# Altium PCB PCB2.PcbDoc
Units mm, origin at the board's own origin, x right, y up, seen from the top; angles counter-clockwise.
Board outline 51.26 x 60.5 mm, 4 copper layers (Component Side, Ground Plane, Power Plane, Solder Side), stack 1.526 mm thick; 65 components, 55 nets, 254 pads, 144 vias.
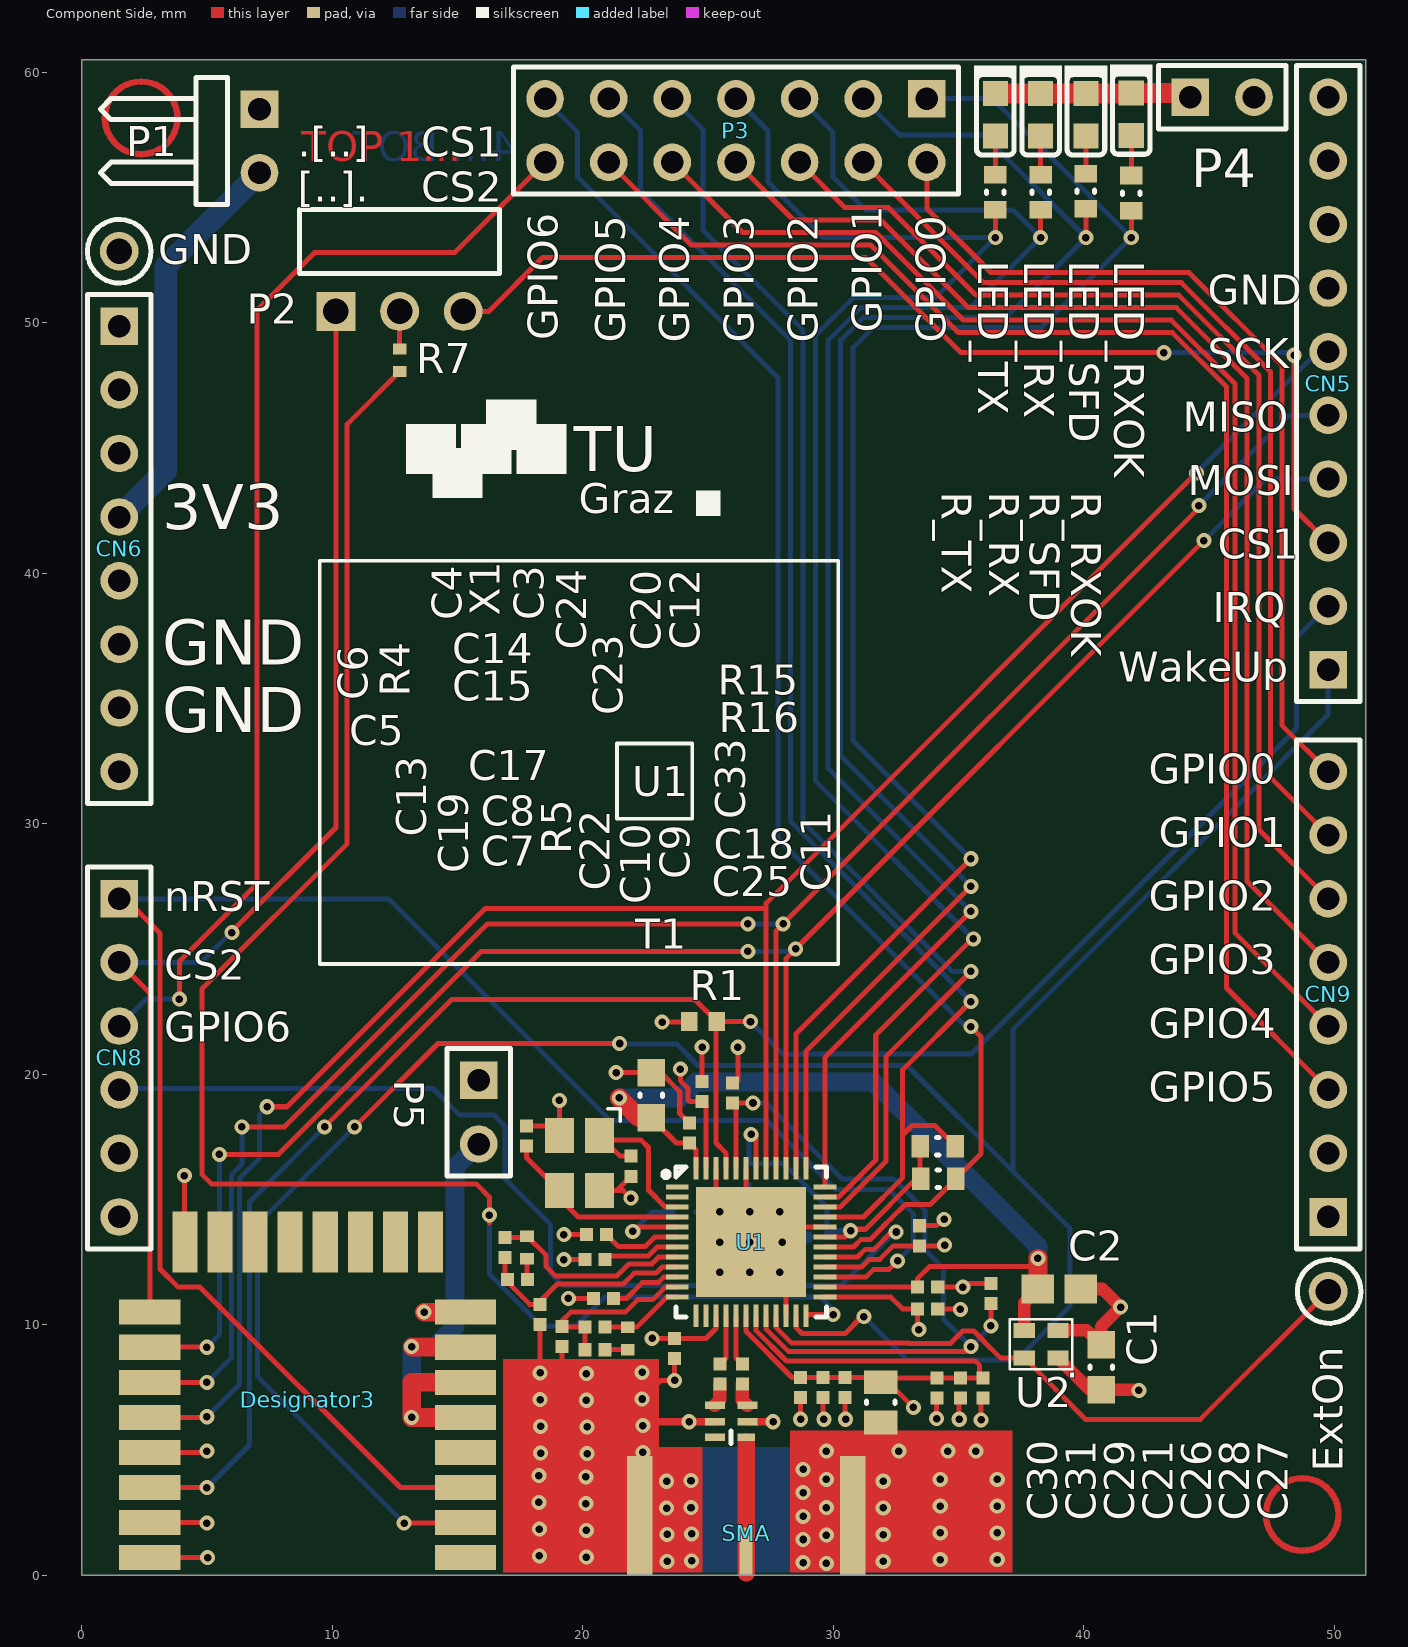
[diagram p0: Component Side view]
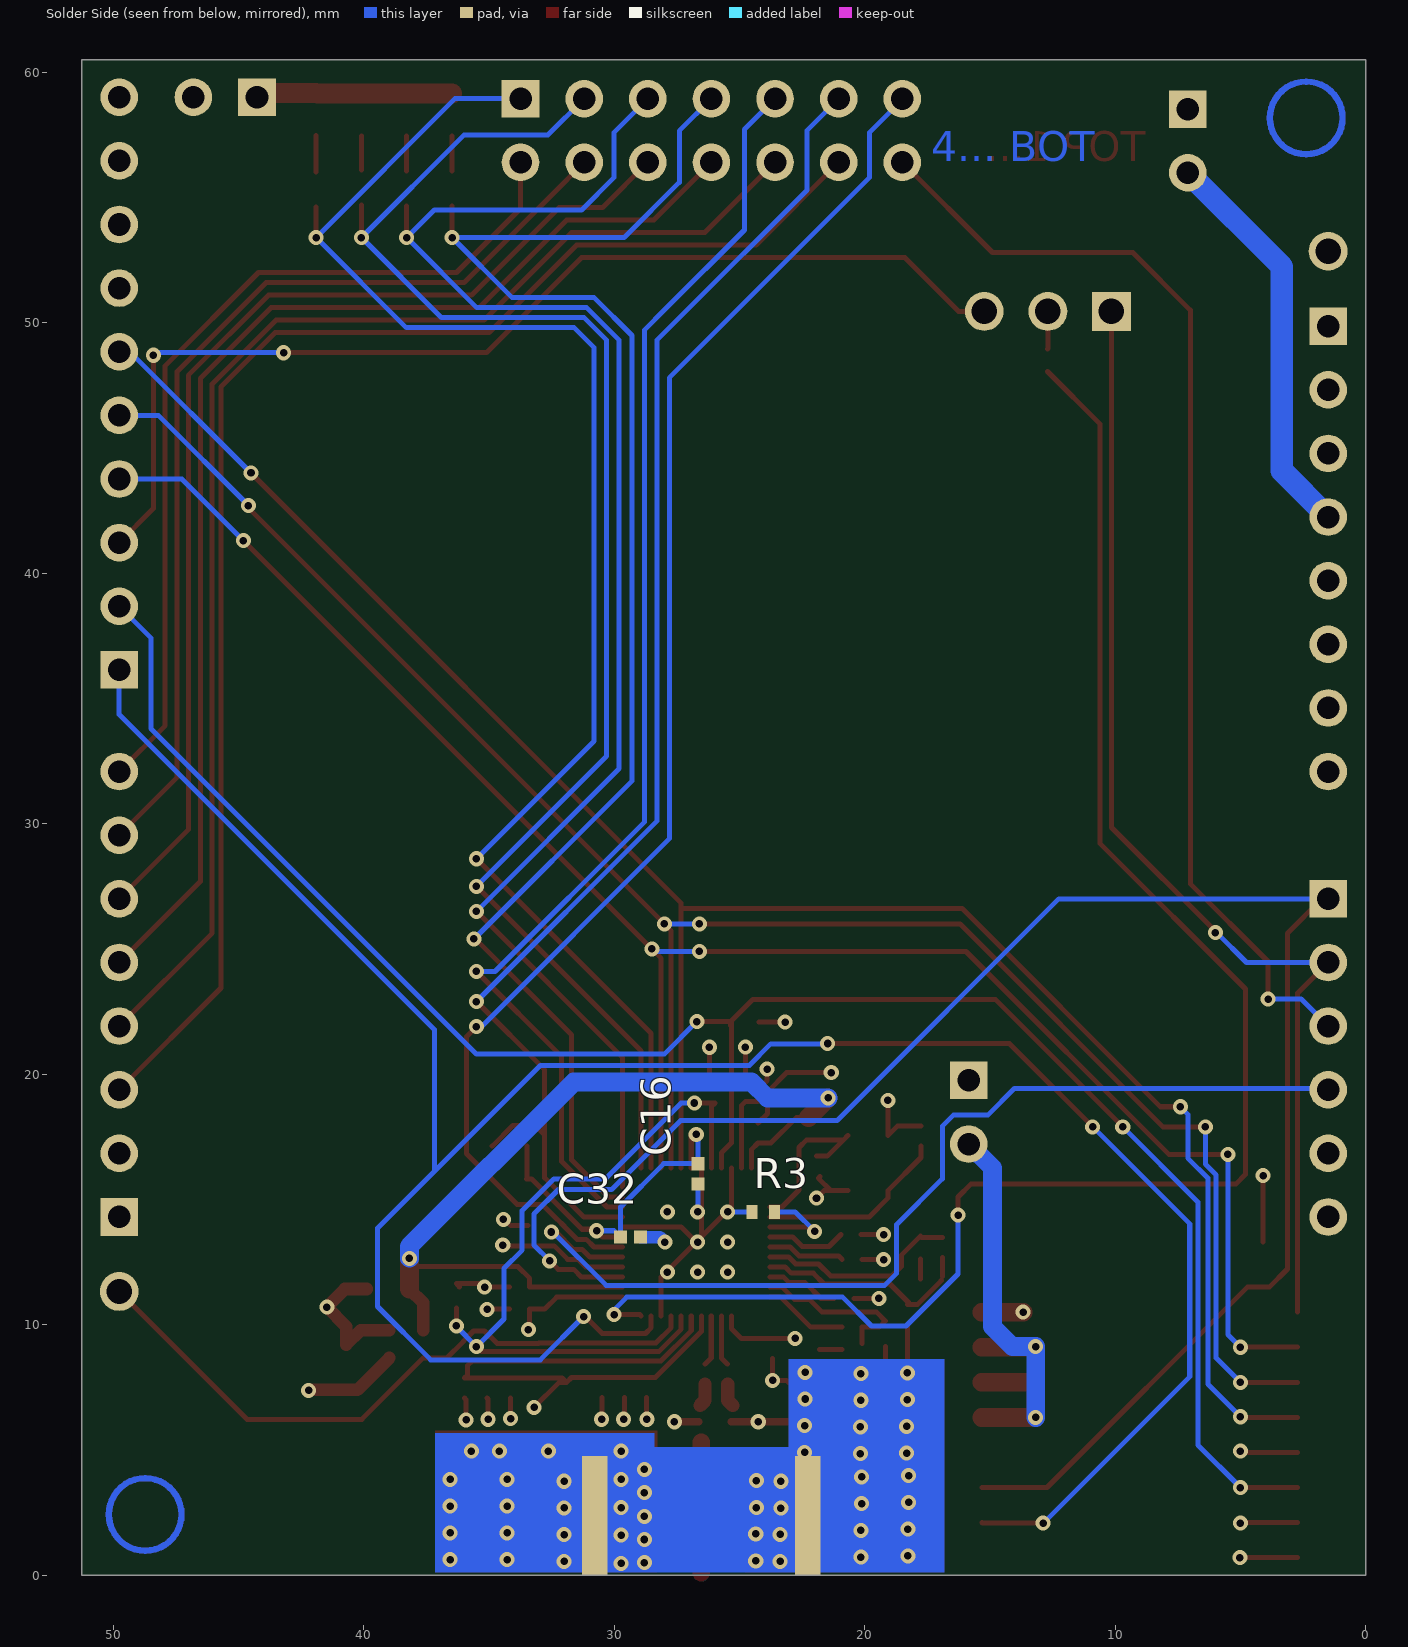
[diagram p1: Solder Side view, seen from below]
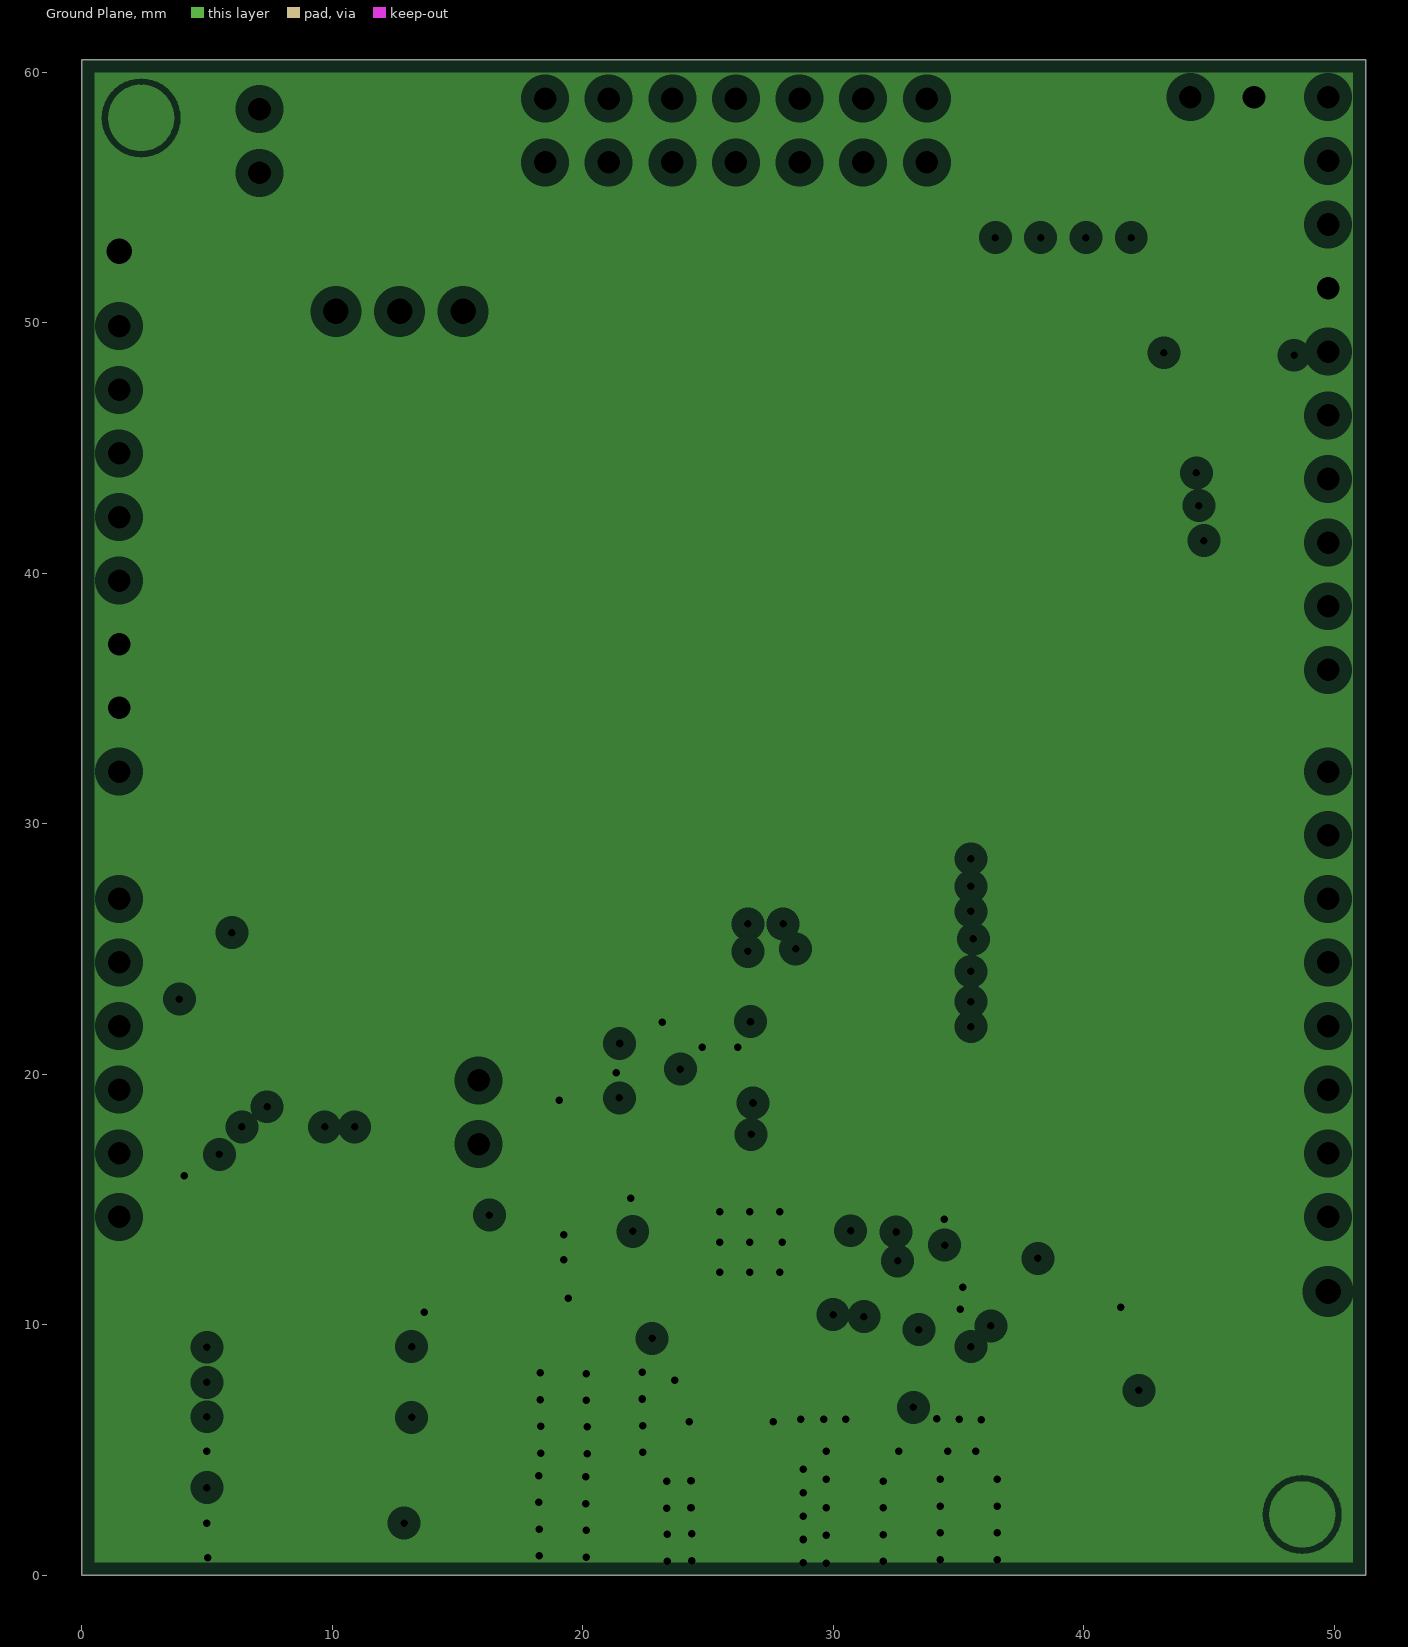
[diagram p2: Ground Plane, clearances drawn from the general rule]
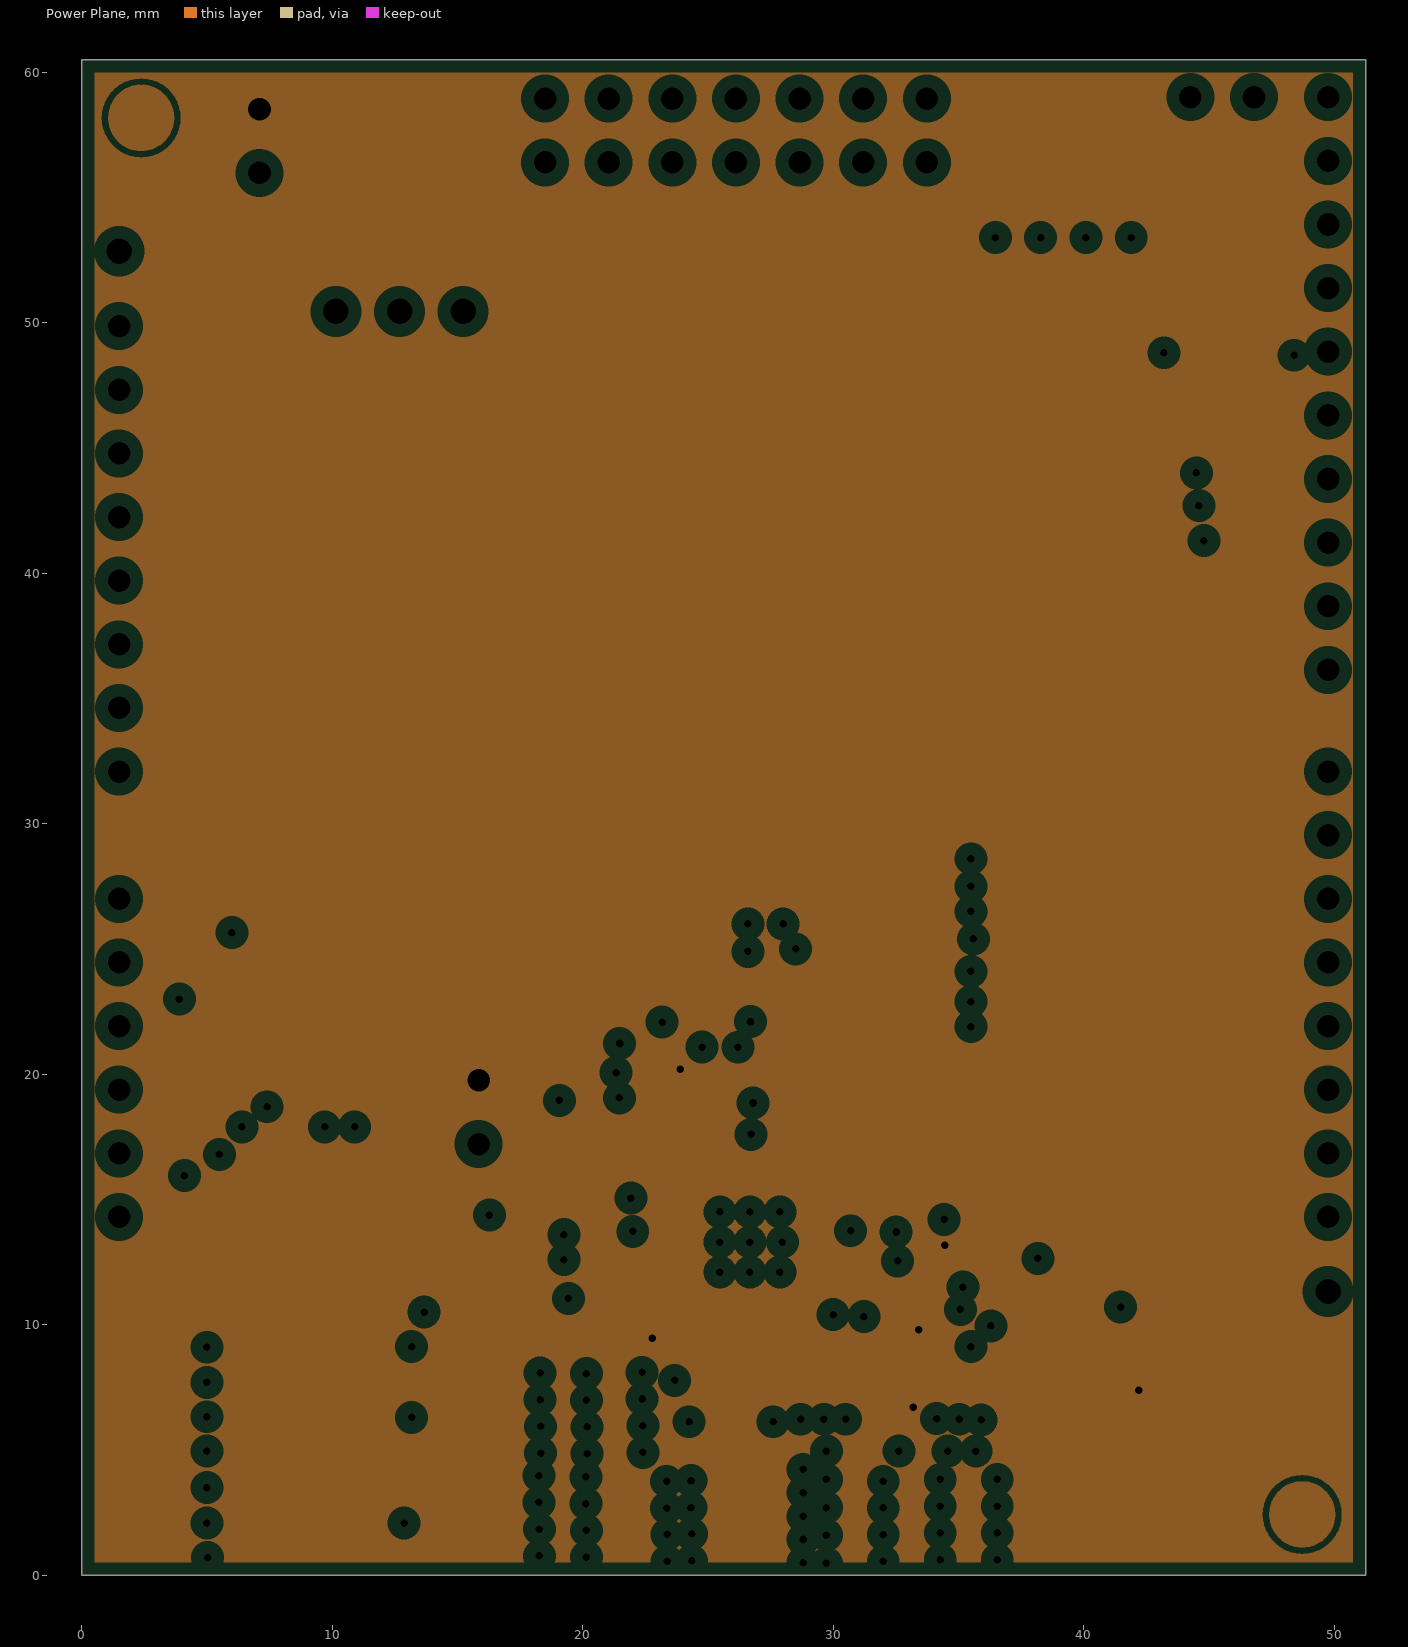
[diagram p3: Power Plane, clearances drawn from the general rule]

## Layer stack, top to bottom
Top Solder: solder mask 0.0102, Solder Resist, Dk 3.5
Component Side: signal copper 0.035
Dielectric 1: prepreg 0.36, FR-4, Dk 4.32
Ground Plane: plane copper 0.018, net GND
Dielectric 3: core 0.7, Dk 4.32
Power Plane: plane copper 0.018, net +3V3
Dielectric 4: prepreg 0.36, Dk 4.32
Solder Side: signal copper 0.035
Bottom Solder: solder mask 0.0102, Solder Resist, Dk 3.5

## Board outline
0,0 51.26,0 51.26,60.5 0,60.5

## Design rules (kind name [scope] priority, off if disabled: settings)
AssemblyTestPointUsage [All] p1: valid=1
Clearance [All] p1: gap=0.1 ignorepadtopadclearanceinfootprint=TRUE except(0.125: Arc-Arc Arc-Track Arc-SMDPad Arc-THPad Arc-Via Track-Track Track-SMDPad Track-THPad Track-Via SMDPad-Via Via-Via; 0.15: SMDPad-SMDPad)
ComponentClearance [All] p1: gap=0.254 collisioncheckmode=3 verticalgap=0.254 showdistances=TRUE
DiffPairsRouting [InDifferentialPair('rf_out')] p1: maxlimit=0.254 minlimit=0.2 mostfreqgap=0.2 toplayer_minwidth=0.2 toplayer_maxwidth=0.381 toplayer_prefwidth=0.2 bottomlayer_minwidth=0.2 bottomlayer_maxwidth=0.381 bottomlayer_prefwidth=0.2 maxuncoupledlength=12.7
FabricationTestPointUsage [All] p1: valid=1 allowmultiple=FALSE
HoleSize [All] p1: absolutevalues=TRUE maxlimit=6 minlimit=0.2 maxpercent=80.000 minpercent=20.000
HoleToHoleClearance [All] p1: gap=0.3 allowstackedmicrovias=FALSE
MaxMinImpedance "Schematic Impedance Constraint_2" [InNet('NetC9_2')] p1: minimum=50,00 maximum=50,00
MaxMinImpedance "Schematic Impedance Constraint_1" [InNet('NetC10_2')] p2: minimum=50,00 maximum=50,00
MaxMinImpedance "Schematic Impedance Constraint" [InNet('NetSMA_S')] p3: minimum=50,00 maximum=50,00
MinimumAnnularRing [All] p1: minimumring=0.1
MinimumSolderMaskSliver [All] p1: minsoldermaskwidth=0.1
PasteMaskExpansion [All] p1: expansion=0.05
PlaneClearance [All] p1: clearance=0.508
PlaneConnect [All] p1: planeconnectstyle=Direct reliefexpansion=0.508 reliefentries=4 reliefconductorwidth=0.254 reliefairgap=0.254
PolygonConnect [All] p1: connectstyle=Direct reliefconductorwidth=0.254 reliefentries=4 polygonreliefangle="90 Angle" airgapwidth=0.254
RoutingCorners [All] p1: cornerstyle=45-Degree minsetback=0.2 maxsetback=0.2
RoutingVias [InDrillLayerPair('Component Side - Solder Side')] p1: holewidth=0.3 width=0.6 viastyle="Through Hole" minholewidth=0.2 minwidth=0.4 maxholewidth=1.02 maxwidth=2.54
SilkToSilkClearance [All] p1: silktosilkclearance=0.1
SilkToSolderMaskClearance [IsPad] p1: minsilkscreentomaskgap=0.15 clearancetoexposedcopper=TRUE
SolderMaskExpansion [All] p1: expansion=0.102
Width Width_2 [InNetClass('50ohmclass')] p1: maxlimit=0.535 minlimit=0.535 preferedwidth=0.535 impedancedriven=TRUE minimp=50.000000 maximp=50.000000 favimp=50.000000
Width [All] p2: maxlimit=1 minlimit=0.2 preferedwidth=0.2 minimp=100.000000 maximp=100.000000 favimp=100.000000
17 further rules are at their usual default settings.

## Components (designator, comment, footprint, x,y, rotation, side; value= is the part's Value field where it differs from the comment)
C1 "4.7uF" CAPC0603(1608)100_M 40.7,8.3 r270 top
C2 "10µF" CAPC1608X100X35ML20T25 39.025,11.425 r0 top
C3 "9pF" CAPC0402(1005)60_L 21.925,16.325 r270 top
C4 "9pF" CAPC0402(1005)60_L 17.75,17.525 r90 top
C5 "27pF" CAPC0402(1005)60_L 17.399,11.811 r180 top
C6 "1.2pF" CAPC0402(1005)60_L 16.891,13.081 r270 top
C7 "820pF" CAPC0402(1005)60_L 20.5,9 r0 top
C8 "18pF" CAPC0402(1005)60_L 20.5,9.9 r180 top
C9 "12pF" CAPC0402(1005)60_L 26.375,8.025 r270 top
C10 "12pF" CAPC0402(1005)60_L 25.475,8.025 r270 top
C11 "100nF" CAPC0402(1005)60_L 36.3,11.25 r90 top
C12 "100nF" CAPC0402(1005)60_L 25.975,19.25 r90 top
C13 "100nF" CAPC0402(1005)60_L 18.288,10.414 r270 top
C14 "100nF" CAPC0402(1005)60_L 20.55,13.6 r180 top
C15 "100nF" CAPC0402(1005)60_L 20.5,12.6 r180 top
C16 "100nF" CAPC0402(1005)60_L 26.65,16.025 r270 bottom
C17 "100nF" CAPC0402(1005)60_L 20.828,11.049 r180 top
C18 "100nF" CAPC0402(1005)60_L 33.775,11.5 r0 top
C19 "100nF" CAPC0402(1005)60_L 19.177,9.525 r270 top
C20 "100nF" CAPC0402(1005)60_L 24.765,19.304 r90 top
C21 "47uF" CAPC0805(2012)145_L 31.9,6.9 r90 top
C22 "10nF" CAPC0402(1005)60_L 23.675,9.05 r270 top
C23 "100nF" CAPC0402(1005)60_L 24.257,17.653 r90 top
C24 "4.7uF" CAPC0603(1608)100_M 22.733,19.166 r270 top
C25 "100nF" CAPC0402(1005)60_L 33.775,10.625 r0 top
C26 "100nF" CAPC0402(1005)60_L 34.15,7.475 r270 top
C27 "10pF" CAPC0402(1005)60_L 35.975,7.475 r90 top
C28 "330pF" CAPC0402(1005)60_L 35.075,7.475 r270 top
C29 "100nF" CAPC0402(1005)60_L 30.48,7.493 r270 top
C30 "10pF" CAPC0402(1005)60_L 28.702,7.493 r90 top
C31 "330pF" CAPC0402(1005)60_L 29.591,7.493 r270 top
C32 "100nF" CAPC0402(1005)60_L 29.35,13.5 r180 bottom
C33 "100nF" CAPC0402(1005)60_L 33.45,13.55 r90 top
CN5 "digital" HDR1X10 49.76,36.14 r90 top locked
CN6 "POWER" HDR1X8 1.5,49.86 r270 top locked
CN8 "analog" HDR1X6 1.5,27 r270 top locked
CN9 "digital" HDR1X8 49.76,14.3 r90 top locked
Designator3 "Comment" DWM1000 12.525,13.3 r180 top
ExtOn "Component_1" KSTN-5000#1 49.8,11.325 r0 top
GND "Component_1" KSTN-5000#2 1.5,52.85 r0 top
LED_RX "APG1608CGKC/T" KING-LED0603-25-GREEN_V 38.283,58.3 r270 top
LED_RXOK "APG1608CGKC/T" KING-LED0603-25-GREEN_V 41.9,58.325 r270 top
LED_SFD "APG1608CGKC/T" KING-LED0603-25-GREEN_V 40.092,58.3 r270 top
LED_TX "APG1608CGKC/T" KING-LED0603-25-GREEN_V 36.475,58.3 r270 top
P1 "CurrentProbe" HDR1X2H 7.1,58.525 r270 top
P2 "Through-hole" SMTC-MTSW-103-08-X-S-229-RA 10.15,50.45 r0 top
P3 "GPIOx Enable" HDR2X7 33.74,58.94 r180 top
P4 "LEDs enable" HDR1X2 44.26,59 r0 top
P5 "DWM enable" HDR1X2 15.85,19.75 r270 top
R1 "100K 1%" RESC0402(1005)_M 24.8,22.1 r180 top value="100000.00 Ohm"
R3 "11K 1%" RESC0402(1005)_L 24.05,14.5 r0 bottom value="11000.00 Ohm"
R4 "16000.00 Ohm" RESC0402(1005)_L 17.78,13.081 r270 top
R5 "270.00 Ohm" RESC0402(1005)_L 21.8,9.45 r90 top
R7 "100.00 Ohm" RESC0402(1005)_L 12.7,48.5 r90 top
R15 "10K" RESC0603(1608)_L 34.175,17.125 r180 top value="10000.00 Ohm"
R16 "10K" RESC0603(1608)_L 34.2,15.825 r180 top value="10000.00 Ohm"
R_RX "470R" RESC0603(1608)_L 38.283,55.2 r90 top value="470.00 Ohm"
R_RXOK "470R" RESC0603(1608)_L 41.9,55.175 r90 top value="470.00 Ohm"
R_SFD "470R" RESC0603(1608)_L 40.092,55.25 r90 top value="470.00 Ohm"
R_TX "470R" RESC0603(1608)_L 36.475,55.2 r90 top value="470.00 Ohm"
SMA "0732511150" sma_footprint 26.525,0 r0 top
T1 "HHM1595A1" HHM1595A1 26.55,5.125 r90 top
U1 "DW1000 IC" QFN-48 26.725,13.3 r0 top
U2 "81-LXDC2HL18A-052" PCBComponent_1 39.55,10.225 r180 top
X1 "38.4MHz" tsx_3225fp 19.075,17.55 r270 top

## Footprints (in the part's own frame and the unit in brackets; to place one, negate y for a bottom-side part, rotate by r counter-clockwise, add the part's x,y. Pads: shape width x height; smd on the part's side, far side on the other; paste and mask are expansions set on the pad)
CAPC0402(1005)60_L [mm] "Chip Capacitor, Body 1.0x0.5mm, Height 0.6mm, IPC High Density"
  rect 0.52x0.52 smd: 1(-0.4,0) 2(0.4,0)
  body extent -0.55,-0.3 0.55,0.3, height 0.6
CAPC0603(1608)100_M [mm] "Chip Capacitor, Body 1.6x0.8mm, Height 1.0mm, IPC Low Density"
  rect 1.1x1.1 smd: 1(-0.9,0) 2(0.9,0)
  silkscreen extent -0.05,-0.45 0.05,0.45, body extent -0.87,-0.47 0.88,0.48, height 1
CAPC0805(2012)145_L [mm] "Chip Capacitor, Body 2.0x1.2mm, Height 1.45mm, IPC High Density"
  rect 0.95x1.35 smd: 1(-0.8,0) 2(0.8,0)
  silkscreen extent -0.05,-0.58 0.05,0.58, body extent -1.1,-0.72 1.1,0.72, height 1.45
CAPC1608X100X35ML20T25 [mm] "Chip Capacitor, 2-Leads, Body 1.80x1.00mm, IPC Low Density"
  rect 1.3x1.15 smd: 1(-0.85,0) 2(0.85,0)
  body extent -0.9,-0.5 0.9,0.5, height 1
DWM1000 [mm]
  rect 2.45x1 smd: EXTON(-2.8,12.6) GPIO7(-2.8,8.4) IRQ/GPIO8(9.8,9.8) RST(-2.8,9.8) SPICLK(9.8,7) SPICSN(9.8,2.8) SPIMISO(9.8,5.6) SPIMOSI(9.8,4.2) VDD3V3(-2.8,4.2) VDD3V3.2(-2.8,5.6) VDDAON(-2.8,7) VSS(-2.8,2.8) VSS.2(9.8,12.6) VSS.3(9.8,11.2) VSS.4(9.8,8.4) WAKEUP(-2.8,11.2)
  rect 1x2.45 smd: GPIO0(7,0) GPIO1(5.6,0) GPIO2(4.2,0) GPIO3(2.8,0) GPIO4(1.4,0) GPIO5(0,0) GPIO6(-1.4,0) VSS.5(8.4,0)
HDR1X2 [mm] "Connector; Header; 2 Position"
  rect 1.5x1.5 hole 0.9: 1(0,0)
  round 1.5 hole 0.9: 2(2.54,0)
  silkscreen extent -1.27,-1.27 3.81,1.27
HDR1X2H [mm] "Connector; Header; 2 Position; Right Angle"
  rect 1.5x1.5 hole 0.9: 1(0,0)
  round 1.5 hole 0.9: 2(2.54,0)
  silkscreen extent -1.27,-6.35 3.81,-1.27
HDR1X6 [mm] "Connector; Header; 6 Position"
  rect 1.5x1.5 hole 0.9: 1(0,0)
  round 1.5 hole 0.9: 2(2.54,0) 3(5.08,0) 4(7.62,0) 5(10.16,0) 6(12.7,0)
  silkscreen extent -1.27,-1.27 13.97,1.27
HDR1X8 [mm] "Connector; Header; 8 Position"
  rect 1.5x1.5 hole 0.9: 1(0,0)
  round 1.5 hole 0.9: 2(2.54,0) 3(5.08,0) 4(7.62,0) 5(10.16,0) 6(12.7,0) 7(15.24,0) 8(17.78,0)
  silkscreen extent -1.27,-1.27 19.05,1.27
HDR1X10 [mm] "Connector; Header; 10 Position"
  rect 1.5x1.5 hole 0.9: 1(0,0)
  round 1.5 hole 0.9: 2(2.54,0) 3(5.08,0) 4(7.62,0) 5(10.16,0) 6(12.7,0) 7(15.24,0) 8(17.78,0) 9(20.32,0) 10(22.86,0)
  silkscreen extent -1.27,-1.27 24.13,1.27
HDR2X7 [mm] "Connector; Header; 7x2 Position"
  rect 1.5x1.5 hole 0.9: 1(0,0)
  round 1.5 hole 0.9: 2(0,2.54) 3(2.54,0) 4(2.54,2.54) 5(5.08,0) 6(5.08,2.54) 7(7.62,0) 8(7.62,2.54) 9(10.16,0) 10(10.16,2.54) 11(12.7,0) 12(12.7,2.54) 13(15.24,0) 14(15.24,2.54)
  silkscreen extent -1.27,-1.27 16.51,3.81
HHM1595A1 [mm]
  rect 0.3x0.7 smd: 1(0.375,0.025)
  rect 0.3x0.8 smd: 2(1,-0.025) 3(1.65,-0.025) 4(1.65,1.275) 5(1,1.275) 6(0.375,1.275)
  silkscreen extent 0.13,0.63 0.63,0.63, body extent 0,0 2,1.25, height 0.8
KING-LED0603-25-GREEN_V [mm] "LED, SMT, Body 1.6 x 0.8 mm, 0.25mm Thickness"
  rect 1x1 smd paste+0 mask+0: 1(0.85,0) 2(-0.85,0)
  silkscreen extent -1.97,-0.85 1.6,0.85, body extent -0.8,-0.4 0.8,0.4, height 0.25
KSTN-5000#1 [mm] "Test Point, Through Hole, Dia 2.54 mm"
  round 1.55 hole 1.016: 1(-0.04,0)
  silkscreen extent -1.27,-1.27 1.27,1.27, body extent -1.25,-1.25 1.25,1.25, height 4.62
KSTN-5000#2 [mm] "Test Point, Through Hole, Dia 2.54 mm"
  round 1.55 hole 1.016: 1(0,0)
  silkscreen extent -1.27,-1.27 1.27,1.27, body extent -1.25,-1.25 1.25,1.25, height 4.62
PCBComponent_1 [mm]
  rect 0.85x0.6 smd: 1(0.575,1.55) 2(1.925,1.55) 3(1.925,0.45) 4(0.575,0.45)
  silkscreen extent 0,0 2.5,2
QFN-48 [mm] "48 Pin QFN"
  rect 0.9x0.2 smd mask+0.05: 1(-2.95,2.2) 2(-2.95,1.8) 3(-2.95,1.4) 4(-2.95,1) 5(-2.95,0.6) 6(-2.95,0.2) 7(-2.95,-0.2) 8(-2.95,-0.6) 9(-2.95,-1) 10(-2.95,-1.4) 11(-2.95,-1.8) 12(-2.95,-2.2) 25(2.95,-2.2) 26(2.95,-1.8) 27(2.95,-1.4) 28(2.95,-1) 29(2.95,-0.6) 30(2.95,-0.2) 31(2.95,0.2) 32(2.95,0.6) 33(2.95,1) 34(2.95,1.4) 35(2.95,1.8) 36(2.95,2.2)
  rect 0.2x0.9 smd mask+0.05: 13(-2.2,-2.95) 14(-1.8,-2.95) 15(-1.4,-2.95) 16(-1,-2.95) 17(-0.6,-2.95) 18(-0.2,-2.95) 19(0.2,-2.95) 20(0.6,-2.95) 21(1,-2.95) 22(1.4,-2.95) 23(1.8,-2.95) 24(2.2,-2.95) 37(2.2,2.95) 38(1.8,2.95) 39(1.4,2.95) 40(1,2.95) 41(0.6,2.95) 42(0.2,2.95) 43(-0.2,2.95) 44(-0.6,2.95) 45(-1,2.95) 46(-1.4,2.95) 47(-1.8,2.95) 48(-2.2,2.95)
  rect 4.4x4.4 smd paste-4.4 mask+0.05: 49(0,0)
  rect 1.3x1.3 on Top Paste mask+0.05: Paste1(0,0) Paste2(-1.45,1.45) Paste3(-1.45,-1.45) Paste4(1.45,-1.45) Paste5(1.45,1.45) Paste6(1.45,0) Paste7(-1.45,0) Paste8(0,1.45) Paste9(0,-1.45)
  silkscreen extent -3.5,-3 3,3, body extent -3,-3 3,3, height 1
RESC0402(1005)_L [mm] "Chip Resistor, Body 1.0x0.5mm, IPC High Density"
  rect 0.45x0.55 smd: 1(-0.45,0) 2(0.45,0)
  body extent -0.52,-0.27 0.53,0.28, height 0.4
RESC0402(1005)_M [mm] "Chip Resistor, Body 1.0x0.5mm, IPC Low Density"
  rect 0.65x0.75 smd: 1(-0.55,0) 2(0.55,0)
  body extent -0.52,-0.28 0.53,0.28, height 0.4
RESC0603(1608)_L [mm] "Chip Resistor, Body 1.6x0.8mm, IPC High Density"
  rect 0.7x0.9 smd: 1(-0.7,0) 2(0.7,0)
  silkscreen extent -0.05,-0.35 0.05,0.35, body extent -0.85,-0.47 0.85,0.47, height 0.6
sma_footprint [mm]
  rect 1.02x4.75 smd: G(-4.25,2.375) G(4.25,2.375)
  rect 1.02x4.75 smd far side: G(-4.25,2.375) G(4.25,2.375)
  rect 0.51x1.91 smd: S(0,0.955)
SMTC-MTSW-103-08-X-S-229-RA [mm] "Assembly .025\" [.64] SQ Post Terminal Strip, 1x3 Pins, Right Angle, 2.54mm Pitch, Male"
  rect 1.55x1.55 hole 1.02: 1(0,0)
  round 1.55 hole 1.02: 2(2.54,0) 3(5.08,0)
  silkscreen extent -1.46,1.52 6.54,4.06, body extent -1.27,-0.32 6.35,9.88, height 3.05
tsx_3225fp [mm]
  rect 1.4x1.15 smd: 1(0,1.6) 2(2.2,1.6) 3(2.2,0) 4(0,0)
  silkscreen extent -1.07,1.92 -0.58,2.42

## Part data
C1 C24: library part CMP-1035-02780-1, "CAP 4.7uF 6.3V ±10% 0603 (1608 Metric) Thickness 1mm SMD", Case-EIA=0603, Case-Metric=1608, Rated Voltage="6.3 V", Tolerance=±10%, Max Thickness="1 mm", Technology=SMT
C2: library part CMP-2000-05443-1, "High Value Multilayer Ceramic Capacitor, 10 uF, +/- 20%, 10 V, -55 to 85 degC, 0603 (1608 Metric), RoHS, Tape and Reel", Manufacturer="Taiyo Yuden", Operating Temperature=-55degC~85degC, Package / Case=0603(1608Metric), Package Description="2-Pin Surface Mount Device, Body 1.70 x 0.90 mm", Package Reference=603, Ratings=-, Standard Package=1, Temperature Coefficient=X5R, Tolerance=±20%, Voltage - Rated=10V, Applications=GeneralPurpose, Capacitance=10µF, Catalog Drawings=xMKSeries_0603_0.8, Category=Capacitors, Datasheet URL=https://datasheet.ciiva.com/15921/288lmk107bbj106malt-15921300.pdf, Datasheet Version=Apr-14, Family=CeramicCapacitors, Featured Product=MultilayerChipCapacitors, Features=-, Height - Seated (Max)=-, Lead Spacing=-, Lead Style=-, Manufacturer URL=http://www.t-yuden.com/, Mounting Type=SurfaceMount,MLCC, Online Catalog=MSeries, Other Names=587-2562-6, Packaging=Digi-Reel, Series=M, Size / Dimension="0.063\"Lx0.031\"W(1.60mmx0.80mm)", Thickness (Max)="0.035\"(0.90mm)"
C3 C4: library part CMP-1034-00643-1, "CAP 9pF 50V ±0.05pF 0402 (1005 Metric) Thickness 0.6mm SMD", Case-EIA=0402, Case-Metric=1005, Rated Voltage="50 V", Tolerance=±0.05pF, Max Thickness="0.6 mm", Technology=SMT
C5: library part CMP-1034-00961-1, "CAP 27pF 50V ±2% 0402 (1005 Metric) Thickness 0.6mm SMD", Case-EIA=0402, Case-Metric=1005, Rated Voltage="50 V", Tolerance=±2%, Max Thickness="0.6 mm", Technology=SMT
C6: library part CMP-1034-00083-1, "CAP 1.2pF 50V ±0.05pF 0402 (1005 Metric) Thickness 0.6mm SMD", Case-EIA=0402, Case-Metric=1005, Rated Voltage="50 V", Tolerance=±0.05pF, Max Thickness="0.6 mm", Technology=SMT
C7: library part CMP-1034-01592-1, "CAP 820pF 50V ±2% 0402 (1005 Metric) Thickness 0.6mm SMD", Case-EIA=0402, Case-Metric=1005, Rated Voltage="50 V", Tolerance=±2%, Max Thickness="0.6 mm", Technology=SMT
C8: library part CMP-1034-00863-1, "CAP 18pF 50V ±2% 0402 (1005 Metric) Thickness 0.6mm SMD", Case-EIA=0402, Case-Metric=1005, Rated Voltage="50 V", Tolerance=±2%, Max Thickness="0.6 mm", Technology=SMT
C9 C10: library part CMP-1034-00768-1, "CAP 12pF 50V ±2% 0402 (1005 Metric) Thickness 0.6mm SMD", Case-EIA=0402, Case-Metric=1005, Rated Voltage="50 V", Tolerance=±2%, Max Thickness="0.6 mm", Technology=SMT
C11 C12 C13 C14 C15 C16 C17 C18 C19 C20 C23 C25 C26 C29 C32 C33: library part CMP-1034-02069-1, "CAP 100nF 16V ±10% 0402 (1005 Metric) Thickness 0.6mm SMD", Case-EIA=0402, Case-Metric=1005, Rated Voltage="16 V", Tolerance=±10%, Max Thickness="0.6 mm", Technology=SMT
C21: library part CMP-1036-04950-1, "CAP 47uF 6.3V ±20% 0805 (2012 Metric) Thickness 1.45mm SMD", Case-EIA=0805, Case-Metric=2012, Rated Voltage="6.3 V", Tolerance=±20%, Max Thickness="1.45 mm", Technology=SMT
C22: library part CMP-1034-01880-1, "CAP 10nF 25V ±10% 0402 (1005 Metric) Thickness 0.6mm SMD", Case-EIA=0402, Case-Metric=1005, Rated Voltage="25 V", Tolerance=±10%, Max Thickness="0.6 mm", Technology=SMT
C27 C30: library part CMP-1034-00722-1, "CAP 10pF 50V ±2% 0402 (1005 Metric) Thickness 0.6mm SMD", Case-EIA=0402, Case-Metric=1005, Rated Voltage="50 V", Tolerance=±2%, Max Thickness="0.6 mm", Technology=SMT
C28 C31: library part CMP-1034-01432-1, "CAP 330pF 50V ±2% 0402 (1005 Metric) Thickness 0.6mm SMD", Case-EIA=0402, Case-Metric=1005, Rated Voltage="50 V", Tolerance=±2%, Max Thickness="0.6 mm", Technology=SMT
CN5: library part "Header 10", "Header, 10-Pin", LatestRevisionDate=17-Jul-2002, LatestRevisionNote="Re-released for DXP Platform.", Publisher="Altium Limited"
CN6 CN9: library part "Header 8", "Header, 8-Pin", LatestRevisionDate=17-Jul-2002, LatestRevisionNote="Re-released for DXP Platform.", Publisher="Altium Limited"
CN8: library part "Header 6", "Header, 6-Pin", LatestRevisionDate=17-Jul-2002, LatestRevisionNote="Re-released for DXP Platform.", Publisher="Altium Limited"
ExtOn GND: "test point"
LED_RX LED_RXOK LED_SFD LED_TX: library part CMP-0239-00001-1, "LED, SMT, 0603(1608), 0.25mm Thickness, Green", Forward Current="30 mA", Power Dissipation="78 mW", Reverse Voltage="5 V", Storage Temperature="-40 to 85 degC", ComponentLink1Description="Manufacturer URL", ComponentLink1URL=http://www.kingbrightusa.com/, ComponentLink2Description=Datasheet, ComponentLink2URL=http://www.kingbrightusa.com/images/catalog/SPEC/APG1608CGKC-T.pdf, DatasheetVersion="Rev. 5B, 10/2012", Mounting Technology="Surface Mount", PackageDescription="2-Pin SMT LED, 1.6 x 0.8 mm Body, 0.25mm Thickness", PackageReference=LED0603-25-GREEN, PackageVersion="Rev. 5B, 10/2012", Packing=Reel, PartNumber=APG1608CGKC/T
P1: library part "Header 2H", "Header, 2-Pin, Right Angle", LatestRevisionDate=17-Jul-2002, LatestRevisionNote="Re-released for DXP Platform.", Publisher="Altium Limited"
P2: library part CMP-1024-00100-1, "Modified .025\" SQ Post Header, Through-hole, Right Angle, -55 to 125 degC, 2.54 mm Pitch, 3-Pin, Male, RoHS", Manufacturer=Samtec, PartNumber=MTSW-103-08-G-S-229-RA, Temperature Range="-55 to 125 degC", ComponentLink1Description="Manufacturer URL", ComponentLink1URL=http://www.samtec.com, ComponentLink2Description=Datasheet, ComponentLink2URL=http://www.samtec.com/documents/webfiles/pdf/MTSW.PDF, ComponentLink3Description="Package Specification", ComponentLink3URL=http://www.samtec.com/documents/webfiles/cpdf/MTSW-XXX-XX-X-X-XXXX-XX-XXX-MKT1.pdf, DatasheetVersion=F-214, Mounting Technology=Through-hole, Orientation="Right Angle", PackageDescription="Assembly .025\" [.64] SQ Post Terminal Strip", PackageReference=MTSW-103-08-X-S-229-RA, PackageVersion="BI, 2/1987", Pitch="2.54 mm", RoHS=True
P3: library part "Header 7X2", "Header, 7-Pin, Dual row", LatestRevisionDate=17-Jul-2002, LatestRevisionNote="Re-released for DXP Platform.", Publisher="Altium Limited"
P4 P5: library part "Header 2", "Header, 2-Pin", LatestRevisionDate=17-Jul-2002, LatestRevisionNote="Re-released for DXP Platform.", Publisher="Altium Limited"
R1: library part CMP-1011-00736-1, "100K 0.063W 1% 0402 (1005 Metric)  SMD", Case-EIA=0402, Case-Metric=1005, Power="0.063 W", Tolerance="1 %", Technology=SMT
R3: library part CMP-1011-00627-1, "11K 0.063W 1% 0402 (1005 Metric)  SMD", Case-EIA=0402, Case-Metric=1005, Power="0.063 W", Tolerance="1 %", Technology=SMT
R4: library part CMP-1011-00644-1, "16K 0.063W 1% 0402 (1005 Metric)  SMD", Case-EIA=0402, Case-Metric=1005, Power="0.063 W", Tolerance="1 %", Technology=SMT
R5: library part CMP-1011-00444-1, "270R 0.063W 1% 0402 (1005 Metric)  SMD", Case-EIA=0402, Case-Metric=1005, Power="0.063 W", Tolerance="1 %", Technology=SMT
R7: library part CMP-1011-00397-1, "100R 0.063W 1% 0402 (1005 Metric)  SMD", Case-EIA=0402, Case-Metric=1005, Power="0.063 W", Tolerance="1 %", Technology=SMT
R15 R16: library part CMP-1012-00098-1, "10K 0.1W 5% 0603 (1608 Metric)  SMD", Case-EIA=0603, Case-Metric=1608, Power="0.1 W", Tolerance="5 %", Technology=SMT
R_RX R_RXOK R_SFD R_TX: library part CMP-1012-00473-1, "470R 0.1W 1% 0603 (1608 Metric)  SMD", Case-EIA=0603, Case-Metric=1608, Power="0.1 W", Tolerance="1 %", Technology=SMT
SMA: "CONN SMA JACK 50 OHM EDGE MNT", Dielectric Material="Polytetrafluoroethylene (PTFE)", Frequency - Max=18GHz, Housing Colour=Gold, Manufacturer="Molex, LLC", Operating Temperature="-65C ~ 165C", Supplier Part Number 1=WM5534-ND, Voltage Rating=500V, Body Finish=Gold, Body Material=Brass, Cable Group=-, Center Contact Material="Beryllium Copper", Center Contact Plating=Gold, ComponentLink1Description=Datasheet, ComponentLink1URL=http://www.molex.com/pdm_docs/sd/732511150_sd.pdf, ComponentLink2Description="Digi-Key Listing", ComponentLink2URL=http://www.digikey.ca/product-detail/en/molex-llc/0732511150/WM5534-ND/1465156, Contact Termination=Solder, Fastening Type=Threaded, Features=-, Impedance="50 Ohm", Ingress Protection=-, Mounting Type="Board Edge, End Launch", PartId=21185, Part Number=0732511150, Price=4.81, Series=73251, Shield Termination=Solder, Style=SMA, Supplier 1=Digi-Key, Type="Receptacle, Female Socket"
T1: "HHM1595A1 3000MHz - 8000MHz 0805", Category=Filter, Category Letter=T, Part Number=HHM1595A1
U1: library part DW1000_QFN_48, "UWB DW1000", Manufacturer="Decawave Ltd.", Part Number=DW1000_QFN, Component Code=n/a, ComponentLink1Description="Datasheet Link", Component Type=Standard
U2 X1: library part Component_1
  U2: Supplier 1=Mouser, Supplier Part Number 1=81-LXDC2HL18A-052

## Via types
v1: diameter 0.6, hole 0.3, Component Side to Solder Side, 143 vias
v2: diameter 0.6, hole 0.3, Component Side to Solder Side, tented top, 1 vias

## Nets (pads, with @x,y where several pads share a name; then routed paths per layer and width w, separated by ;. In a path a pad name is that pad's centre, name@x,y a point inside that pad or via, vN(x,y) a via of type N, cw(c..) or ccw(c..) an arc to the next point about the centre after c; other vN are vias at no path point)
+1V8: C2.1 C18.1 C23.1 C24.2 U1.26 U1.48 U2.3 | length 37
  Component Side w0.2: C24.2@22.247,18.266 C24.2 23.746,17.253 C23.1 24.525,16.985 U1.48 ; U1.26 C18.1 33.375,11.85 33.85,12.325 38.175,12.325
  Component Side w0.5: U2.3 37.625,10.875 C2.1@38.175,11.4
  Component Side w0.75: v1(21.463,19.05) C24.2@22.247,18.266 ; C2.1 38.175,12.325 v1(38.175,12.65)
  Solder Side w0.2: v1@38.163,12.662 v1(38.175,12.65)
  Solder Side w0.75: v1(21.463,19.05) 23.881,19.05 24.516,19.685 31.615,19.685 38.175,13.125 v1(38.175,12.65)
+3V3: C1.2 C20.1 C21.2 C22.1 C25.1 C26.1 C27.2 C28.1 C29.1 C30.2 C31.1 C33.1 P1.1 P5.1 U1.15 U1.18 U1.19 U1.25 U1.28 U1.47 U2.1 | length 44.9
  Component Side w0.2: v1(22.775,9.45) C22.1 24.925,9.45 25.325,9.85 U1.15 ; v1(23.9,20.2) 23.9,19.74 24.201,19.439 24.201,18.979 24.276,18.904 C20.1 24.925,18.744 U1.47 ; U1.18 26.525,9.725 28.357,7.893 C30.2 C31.1 C29.1 31.707,7.893 C21.2 ; U1.19 26.925,9.763 28.138,8.55 35.675,8.55 35.85,8.375 35.85,8 C27.2 C28.1 C26.1 32.075,7.875 C21.2 ; U1.25 32.3,11.1 32.775,10.625 C25.1 33.375,9.85 v1(33.425,9.8) ; U1.28 31.141,12.3 31.451,12.61 31.86,12.61 32.4,13.15 C33.1 34.425,13.15 v1(34.45,13.175) ; v2(33.2,6.7) 32.2,7.7 C21.2
  Component Side w0.5: U2.1 40.25,7.4 C1.2 42.175,7.4 v1(42.2,7.375)
CS1: CN5.3 P2.3 | length 43.8
  Component Side w0.2: P2.3 16.25,50.45 18.4,52.6 31.3,52.6 35.1,48.8 v1(43.2,48.8) ; v1@48.4,48.6 48.4,42.58 CN5.3 ; v1(48.4,48.7) v1@48.6,48.7
  Solder Side w0.2: v1(43.2,48.8) v1@48.4,48.8 ; CN5.3@49.755,41.225 CN5.3
CS2: CN8.2 Designator3.SPICSN P2.1 | length 46
  Component Side w0.2: CN8.2 2.725,23.235 Designator3.SPICSN ; v1(6,25.65) 6,25.7 10.15,29.85 P2.1
  Solder Side w0.2: CN8.2 4.76,24.46 5.95,25.65 v1(6,25.65)
ExtOn: ExtOn.1 U1.21 U2.2 | length 26.6
  Component Side w0.2: U1.21 27.725,9.882 28.332,9.275 33.008,9.275 33.033,9.25 34.675,9.25 35.175,9.75 35.617,9.75 36.025,9.342 36.025,9.325 36.675,8.675 U2.2 40.075,6.225 44.66,6.225 ExtOn.1
GND: C1.1 C2.2 C3.2 C4.2 C11.2 C12.2 C13.2 C14.2 C15.2 C16.2 C17.2 C18.2 C19.2 C20.2 C21.1 C22.2 C23.2 C24.1 C25.2 C26.2 C27.1 C28.2 C29.2 C30.1 C31.2 C32.2 C33.2 CN5.7 CN6.6 CN6.7 Designator3.VSS Designator3.VSS.2 Designator3.VSS.3 Designator3.VSS.4 Designator3.VSS.5 GND.1 P4.2 R1.2 R3.2 SMA.G T1.2 T1.5 U1.22 U1.32 U1.43 U1.46 U1.49 U2.4 X1.2 X1.4 | length 70
  Component Side w0.2: Designator3.VSS.2 v1(5.025,0.7) ; Designator3.VSS.3 4.975,2.1 v1(5,2.075) ; Designator3.VSS.4 4.95,4.9 v1(5,4.95) ; Designator3.VSS.5@4.1,13.3 v1(4.1,15.95) ; Designator3.VSS@15.25,10.575 Designator3.VSS ; C4.2 18.7,17.925 X1.4 v1(19.075,18.95) ; 18.288,8.509 C13.2 ; 19.177,8.509 C19.2 ; v1@19.2,13.55 v1(19.25,13.6) C14.2 ; v1(19.25,12.6) C15.2 ; v1(19.431,11.049) C17.2 ; X1.2 21.35,15.35 ; v1(21.336,20.066) C24.1 23.114,20.066 23.876,19.304 23.876,18.434 C23.2 ; C3.2@21.788,15.913 21.85,15.85 21.35,15.35 ; v1(21.925,15.05) 21.625,15.35 21.35,15.35 ; v1(22.375,7.033) 23.117,7.775 v1(23.675,7.775) C22.2 ; v1(23.175,22.075) R1.2@24.225,22.075 ; C20.2 v1(24.765,21.082) ; U1.49@25.325,14.7 U1.46 ; U1.49@25.5,14.525 U1.49@26.525,13.5 ; C12.2@26.125,19.675 26.2,19.75 v1(26.2,21.075) ; U1.43 U1.49@26.525,13.5 ; U1.49@27.9,12.125 U1.49 ; U1.22 U1.49@28.125,11.9 ; v1(28.7,6.225) 28.702,6.227 C30.1 ; C31.2 29.591,6.259 v1(29.625,6.225) ; 29.625,5.435 30.11,4.95 ; U1.32 27.325,13.9 U1.49 ; C29.2 30.48,6.245 v1(30.5,6.225) ; 30.5,5.678 31.228,4.95 ; 32.275,5.021 32.346,4.95 v1(32.625,4.95) v1@32.675,5 ; C33.2 34.125,13.95 v1@34.425,14.25 ; v1@34.15,6.267 v1(34.133,6.25) 34.133,7.058 C26.2 ; C25.2 35.065,10.625 v1(35.076,10.614) ; C18.2 v1(35.175,11.5) 35.325,11.65 C11.2 ; v1@34.475,5.057 v1(34.582,4.95) ; v1@35.025,6.233 v1(35.033,6.225) 35.033,7.033 C28.2 ; v1@35.9,6.208 v1(35.908,6.2) 35.908,7.008 C27.1 ; C11.2@36.175,11.5 C11.2@36.25,11.575 ; U1.49@26.525,13.5 U1.49
  Component Side w0.3: v1(22.4,5.967) 22.558,6.125 v1(24.25,6.125) T1.5@25.325,6.125 ; T1.2@26.63,6.125 v1(27.6,6.125) ; v1@28.6,6.125 v1(28.7,6.225)
  Component Side w0.5: U2.4 40.125,9.775 C1.1 40.7,9.925 v1(41.475,10.7) 40.75,11.425 C2.2
  Component Side w0.75: v1(13.675,10.5) Designator3.VSS
  Solder Side w0.2: R3.2 v1(25.475,14.5) ; C16.2 26.65,14.525 v1(26.675,14.5) ; v1(28.7,6.225) v1@28.725,6.25 ; v1@29.6,6.25 v1(29.625,6.225) ; 29.625,5.435 30.11,4.95 ; v1@30.475,6.25 v1(30.5,6.225)
  Solder Side w0.5: v1(27.975,13.3) 28.175,13.5 C32.2
  other v1: 29.725,0.475 28.8,0.5 23.375,0.55 32,0.55 24.35,0.575 34.275,0.625 36.55,0.625 20.15,0.725 18.275,0.775 28.8,1.425 29.725,1.6 23.375,1.625 32,1.617 24.35,1.65 34.275,1.692 36.55,1.692 20.15,1.792 18.275,1.842 28.8,2.35 23.35,2.675 24.325,2.7 29.725,2.7 32,2.683 34.275,2.758 36.55,2.758 20.125,2.858 18.25,2.908 28.8,3.3 23.35,3.75 32,3.75 24.325,3.775 29.725,3.825 34.275,3.825 36.55,3.825 20.125,3.925 18.25,3.975 28.8,4.225 20.175,4.85 18.325,4.875 22.4,4.9 29.725,4.95 35.7,4.95 20.175,5.917 18.325,5.942 20.15,6.983 18.3,7.008 20.15,8.05 18.3,8.075 22.375,8.1 25.475,12.1 26.675,12.1 27.875,12.1 25.475,13.3 26.675,13.3 34.425,14.2 27.875,14.5
GPIO6_out: CN8.3 P3.14 | length 45.6
  Component Side w0.2: v1(3.9,23) 3.9,24.5 7,27.6 7,50.5 9.3,52.8 14.9,52.8 P3.14
  Solder Side w0.2: CN8.3 2.58,23 v1(3.9,23)
NetC3_1: C3.1 U1.3 X1.1 | length 6.6
  Component Side w0.2: X1.1 X1.1@20.843,17.382 ; C3.1 21.5,16.725 X1.1@20.843,17.382 ; U1.3 23.3,14.7 22.625,15.375 22.625,17.075 22.318,17.382 X1.1@20.843,17.382
NetC4_1: C4.1 U1.4 X1.3 | length 7.6
  Component Side w0.2: C4.1 17.75,16.675 X1.3 19.075,15.05 19.825,14.3 U1.4
NetC5_1: C5.1 R4.2 | length 0.8
  Component Side w0.2: C5.1@17.78,11.83 R4.2
NetC6_1: C6.1 R4.1 U1.8 | length 8.1
  Component Side w0.2: C6.1 R4.1@17.73,13.481 ; R4.1 18.542,12.769 18.542,12.319 18.911,11.95 21.369,11.95 21.844,12.425 22.76,12.425 23.035,12.7 U1.8
NetC7_2: C7.2 R5.1 | length 0.9
  Component Side w0.2: C7.2 R5.1
NetC8_1: C8.1 R5.2 U1.12 | length 3.4
  Component Side w0.2: C8.1 R5.2 22.154,9.9 23.354,11.1 U1.12
NetC9_1: C9.1 U1.17 | length 2
  Component Side w0.203: U1.17 26.125,8.675 C9.1
NetC9_2: C9.2 T1.3 | length 0.9
  Component Side w0.535: C9.2 26.375,6.975 T1.3
NetC10_1: C10.1 U1.16 | length 2
  Component Side w0.203: C10.1 25.725,8.675 U1.16
NetC10_2: C10.2 T1.4 | length 0.9
  Component Side w0.535: T1.4 25.475,6.975 C10.2
NetCN5_1: CN5.1 Designator3.WAKEUP U1.23 | length 97.2
  Component Side w0.2: v1(10.9,17.9) 14.225,21.225 v1(21.479,21.225) v1@21.479,21.107 ; v1(12.875,2.075) 15.3,2.075 Designator3.WAKEUP ; U1.23 28.525,9.882 28.755,9.652 30.48,9.652 31.153,10.325 v1(31.225,10.325)
  Solder Side w0.2: v1(10.9,17.9) 7.025,14.025 7.025,7.925 v1(12.875,2.075) ; v1(21.479,21.225) 21.463,21.209 23.749,21.209 24.608,20.35 32.95,20.35 37.175,16.125 ; v1(31.225,10.325) 32.95,8.6 37.325,8.6 39.45,10.725 39.45,13.85 37.175,16.125 ; CN5.1 49.76,34.36 37.175,21.775 37.175,16.125
NetCN5_2: CN5.2 Designator3.IRQ/GPIO8 R1.1 U1.45 | length 77.4
  Component Side w0.2: Designator3.IRQ/GPIO8 v1@5,3.5 ; v1(9.7,17.9) 14.787,22.987 24.463,22.987 R1.1 ; R1.1@25.325,22.051 R1.1@25.325,21.925 ; R1.1@25.375,22.076 R1.1@25.35,22.051 ; U1.45@25.716,16.25 25.716,16.859 25.325,17.25 R1.1@25.325,21.925 ; v1(26.7,22.1) R1.1 ; R1.1@25.325,21.925 25.35,21.95 R1.1@25.35,22.051 ; R1.1@25.35,22.051 R1.1
  Solder Side w0.2: v1(5,3.5) 6.7,5.2 6.7,14.9 v1(9.7,17.9) ; v1(26.7,22.1) 28,20.8 35.5,20.8 48.5,33.8 48.5,37.42 CN5.2
NetCN5_4: CN5.4 Designator3.SPIMOSI U1.39 | length 74.5
  Component Side w0.2: Designator3.SPIMOSI v1@5,9.1 ; v1(5.5,16.8) 7.858,16.8 15.958,24.9 v1(26.6,24.9) ; U1.39 28.125,24.625 v1(28.5,25) v1(44.8,41.3)
  Solder Side w0.2: v1(5,9.1) 5.5,9.6 v1(5.5,16.8) ; v1(26.6,24.9) 28.4,24.9 v1(28.5,25) ; v1(44.8,41.3) 47.26,43.76 CN5.4 CN5.4@49.745,43.775
NetCN5_5: CN5.5 Designator3.SPIMISO U1.40 | length 78.4
  Component Side w0.2: Designator3.SPIMISO v1@5,7.7 ; v1(6.4,17.9) 8.1,17.9 16.2,26 v1(26.6,26) ; U1.40 27.725,25.725 v1(28,26) v1@44.65,42.65 ; v1@44.6,42.642 v1(44.6,42.7)
  Solder Side w0.2: v1(5,7.7) 5.975,8.675 5.975,15.983 6.4,16.408 6.4,17.75 6.25,17.9 v1(6.4,17.9) ; v1(26.6,26) v1(28,26) ; v1(44.6,42.7) 48.2,46.3 CN5.5 CN5.5@49.735,46.275
NetCN5_6: CN5.6 Designator3.SPICLK U1.41 | length 81
  Component Side w0.2: Designator3.SPICLK 4.975,6.3 v1(5,6.325) ; v1(7.4,18.7) 8.2,18.7 16.119,26.619 27.325,26.619 ; U1.41 27.325,26.619 ; v1(44.5,44) 27.325,26.825 27.325,26.619
  Solder Side w0.2: v1(5,6.325) 6.3,7.625 6.3,15.848 7.1,16.648 7.1,18.4 v1(7.4,18.7) ; v1(44.5,44) 49.34,48.84 CN5.6
NetCN6_4: CN6.4 P1.2 | length 16.1
  Solder Side w0.9: CN6.4 3.35,44.09 3.35,52.235 P1.2
NetCN8_1: CN8.1 Designator3.RST U1.27 | length 73.6
  Component Side w0.2: CN8.1 1.75,27 3.125,25.625 3.125,12.225 3.85,11.5 4.725,11.5 12.725,3.5 Designator3.RST ; U1.27 31.306,11.9 31.616,12.21 32.235,12.21 v1(32.575,12.55)
  Solder Side w0.2: CN8.1 12.25,27 21.1,18.15 27.35,18.15 30.1,15.4 32.225,15.4 33.2,14.425 33.2,13.175 v1(32.575,12.55)
NetCN8_4: CN8.4 U1.29 | length 40.8
  Component Side w0.2: U1.29 30.975,12.7 31.285,13.01 31.635,13.01 32.325,13.7 v1(32.513,13.7)
  Solder Side w0.2: CN8.4 1.545,19.425 14.025,19.425 15.075,18.375 16.45,18.375 16.9,17.925 16.9,15.824 18.725,13.999 18.725,12.05 19.017,11.758 19.201,11.574 30.324,11.574 32.45,13.7 v1(32.513,13.7)
NetCN9_3: CN9.3 P3.12 | length 58.1
  Component Side w0.2: P3.12 24.34,53.1 31.5,53.1 35,49.6 43.54,49.6 45.7,47.44 45.7,23.44 CN9.3
  Solder Side w0.2: CN9.3@49.74,19.4 CN9.3
NetCN9_4: CN9.4 P3.10 | length 53.3
  Component Side w0.2: P3.10 26.38,53.6 31.7,53.6 35.2,50.1 43.5,50.1 46.05,47.55 46.05,25.63 CN9.4
  Solder Side w0.2: CN9.4@49.74,21.9 CN9.4
NetCN9_5: CN9.5 P3.8 | length 48.7
  Component Side w0.2: P3.8 28.42,54.1 31.9,54.1 35.4,50.6 43.7,50.6 46.525,47.775 46.525,27.695 CN9.5
  Solder Side w0.2: CN9.5@49.745,24.475 CN9.5
NetCN9_6: CN9.6 P3.6 | length 43.9
  Component Side w0.2: P3.6 30.46,54.6 32.2,54.6 35.7,51.1 43.8,51.1 47,47.9 47,29.76 CN9.6
NetCN9_7: CN9.7 P3.4 | length 39.2
  Component Side w0.2: P3.4 32.5,55.1 36,51.6 43.9,51.6 47.45,48.05 47.45,31.85 CN9.7
  Solder Side w0.2: CN9.7@49.75,29.55 CN9.7
NetCN9_8: CN9.8 P3.2 | length 36
  Component Side w0.2: P3.2@33.74,56.5 P3.2 33.74,54.56 36.3,52 44.2,52 47.925,48.275 47.925,33.915 CN9.8
  Solder Side w0.2: CN9.8@49.54,32.3 CN9.8
NetLED_RX_1: LED_RX.1 R_RX.2 | length 1.4
  Component Side w0.2: R_RX.2@38.283,56.05 LED_RX.1
NetLED_RX_2: LED_RX.2 LED_RXOK.2 LED_SFD.2 LED_TX.2 P4.1 | length 7.9
  Component Side w0.2: LED_RXOK.2@41.85,59.15 41.875,59.175 LED_RXOK.2
  Component Side w0.8: LED_TX.2 LED_RX.2 LED_SFD.2 LED_RXOK.2@41.85,59.15 ; LED_RXOK.2 44.085,59.175 P4.1
NetLED_RXOK_1: LED_RXOK.1 R_RXOK.2 | length 1.4
  Component Side w0.2: R_RXOK.2@41.9,56.025 LED_RXOK.1
NetLED_SFD_1: LED_SFD.1 R_SFD.2 | length 1.3
  Component Side w0.2: R_SFD.2@40.092,56.1 LED_SFD.1
NetLED_TX_1: LED_TX.1 R_TX.2 | length 1.4
  Component Side w0.2: R_TX.2@36.475,56.05 LED_TX.1
NetP2_2: P2.2 R7.2 | length 1.5
  Component Side w0.2: P2.2 12.69,48.96 R7.2
NetP3_1: P3.1 R_RXOK.1 U1.38 | length 62.2
  Component Side w0.2: U1.38 28.525,21.625 v1(35.5,28.6) ; v1(41.9,53.4) R_RXOK.1 R_RXOK.1@41.9,54.625
  Solder Side w0.2: P3.1 36.36,58.94 v1(41.9,53.4) 38.3,49.8 31.6,49.8 30.8,49 30.8,33.3 v1(35.5,28.6)
NetP3_3: P3.3 R_SFD.1 U1.37 | length 61.9
  Component Side w0.2: U1.37 28.925,20.925 v1(35.5,27.5) ; v1(40.092,53.4) R_SFD.1 R_SFD.1@40.092,54.7
  Solder Side w0.2: P3.3 32.64,57.5 35.992,57.5 v1(40.092,53.4) 36.892,50.2 31.2,50.2 30.3,49.3 30.3,49.06 30.3,32.7 v1(35.5,27.5) v1@35.518,27.482
NetP3_5: P3.5 R_RX.1 U1.36 | length 62.9
  Component Side w0.2: U1.36 29.675,20.675 v1(35.5,26.5) ; v1(38.283,53.4) R_RX.1 R_RX.1@38.283,54.65
  Solder Side w0.2: P3.5 30,57.6 30,55.8 31.3,54.5 37.183,54.5 v1(38.283,53.4) 35.483,50.6 31.1,50.6 29.8,49.3 29.8,32.2 v1@35.45,26.55
NetP3_7: P3.7 R_TX.1 U1.35 | length 63.6
  Component Side w0.2: U1.35 30.225,15.1 31.7,16.575 31.7,21.566 v1@35.467,25.333 ; v1(36.475,53.4) R_TX.1 R_TX.1@36.475,54.65
  Solder Side w0.2: P3.7 27.4,57.66 27.4,55.6 29.6,53.4 v1(36.475,53.4) 34.075,51 30.8,51 29.289,49.489 29.3,49.479 29.3,49.2 29.3,47 29.3,31.7 v1(35.6,25.4)
NetP3_9: P3.9 U1.34 | length 52.4
  Component Side w0.2: U1.34 30.285,14.7 32.1,16.515 32.1,20.7 v1(35.5,24.1)
  Solder Side w0.2: P3.9 24.8,57.72 24.8,53.7 27.95,50.55 28.8,49.7 28.8,30.06 34.76,24.1 v1(35.5,24.1)
NetP3_11: P3.11 R15.1 U1.33 | length 56.5
  Component Side w0.2: U1.33 31.212,14.3 32.775,15.863 32.775,17.575 ; R15.1 34.05,17.95 33.15,17.95 32.775,17.575 ; v1(35.5,22.9) 32.775,20.175 32.775,17.575
  Solder Side w0.2: P3.11 22.3,57.68 22.3,55.3 27.4,50.2 28.3,49.3 28.3,30.1 v1(35.5,22.9)
NetP3_13: P3.13 R16.1 U1.30 | length 57.1
  Component Side w0.2: U1.30 30.809,13.1 31.119,13.41 31.488,13.41 31.988,13.909 31.988,13.917 32.295,14.225 32.303,14.225 32.878,14.8 33.875,14.8 R16.1 35.9,16.825 35.9,21.5 v1(35.5,21.9)
  Solder Side w0.2: P3.13@18.48,58.92 19.8,57.6 19.8,55.8 27.8,47.8 27.8,29.4 v1@35.4,21.8
NetR3_1: R3.1 U1.5 | length 3.8
  Component Side w0.2: v1(22,13.725) 22.175,13.9 U1.5
  Solder Side w0.2: v1(22,13.725) 22.775,14.5 R3.1
NetR7_1: R7.1 U1.24 | length 67.1
  Component Side w0.2: R7.1 10.6,45.95 10.6,29.2 4.8,23.4 4.8,16 5.175,15.625 15.75,15.625 16.275,15.1 v1(16.275,14.375) 16.275,14.057 ; U1.24 28.975,10.4 v1(30,10.4)
  Solder Side w0.2: v1(16.275,14.375) 16.275,12.025 18.35,9.95 19.729,9.95 20.879,11.1 29.5,11.1 30,10.6 v1(30,10.4)
NetSMA_S: SMA.S T1.1 | length 5.2
  Component Side w0.7: SMA.S@26.525,0.1 SMA.S 26.525,5.3
VCCDWM: Designator3.VDD3V3 Designator3.VDD3V3.2 Designator3.VDDAON P5.2 | length 20.4
  Component Side w0.75: v1@13.2,9.1 Designator3.VDD3V3 ; Designator3.VDDAON v1(13.175,6.3) 13.175,7.7 Designator3.VDD3V3.2
  Solder Side w0.75: v1(13.175,6.3) v1(13.175,9.125) 14.1,9.125 14.9,9.925 14.9,16.26 P5.2
VDDCLK: C5.2 C6.2 C13.1 U1.9 | length 8.6
  Component Side w0.2: C5.2@16.891,11.919 C6.2 ; C5.2@16.945,11.757 17.888,10.814 C13.1 ; C13.1@18.234,10.868 18.991,11.625 21.625,11.625 22.055,12.055 22.93,12.055 23.175,12.3 U1.9
VDDDIG: C11.1 C12.1 U1.20 U1.44 | length 29.6
  Component Side w0.2: U1.44 26.125,18.7 C12.1 v1(26.8,18.85) ; U1.20 27.325,9.822 28.222,8.925 35.3,8.925 v1(35.5,9.125) 35.565,9.19 v1@35.7,9.19 ; v1(36.3,9.95) C11.1@36.3,10.675
  Solder Side w0.2: v1(26.8,18.85) 27.325,18.85 30.35,15.825 32.407,15.825 33.675,14.557 33.675,12.975 34.4,12.25 34.4,10.225 v1(35.5,9.125) 36.3,9.925 v1(36.3,9.95)
VDDIF: C15.1 U1.7 | length 3.1
  Component Side w0.2: C15.1 21.05,12.75 22.625,12.75 22.975,13.1 U1.7
VDDIO: C16.1 C32.1 R15.2 R16.2 U1.31 U1.42 | length 15
  Component Side w0.2: v1(26.725,17.6) 26.9,17.6 26.925,17.625 U1.42 ; U1.31 30.475,13.5 30.7,13.725 v1(30.7,13.75) 30.76,13.81 31.287,13.81 33.302,15.825 R16.2 33.475,15.85 R15.2
  Solder Side w0.2: v1(26.725,17.6) 26.65,17.525 C16.1 28.025,16.425 29.75,14.7 C32.1 30,13.75 v1(30.7,13.75)
VDDMS: C14.1 U1.6 | length 3.2
  Component Side w0.2: C14.1 21.425,13.125 22.5,13.125 22.875,13.5 U1.6
VDDSYN: C17.1 U1.10 | length 2.9
  Component Side w0.2: C17.1 21.749,11.049 22.375,11.675 23.01,11.675 23.235,11.9 U1.10
VDDVCO: C7.1 C8.2 C19.1 U1.11 | length 6.8
  Component Side w0.2: C7.1@20.1,9.25 C8.2 19.425,9.9 19.175,10.15 19.525,10.5 21.7,10.5 22.2,11 22.794,11 23.294,11.5 U1.11
pads on no net: CN5.8 CN5.9 CN5.10 CN6.1 CN6.2 CN6.3 CN6.5 CN6.8 CN8.5 CN8.6 CN9.1 CN9.2 Designator3.EXTON Designator3.GPIO0 Designator3.GPIO1 Designator3.GPIO2 Designator3.GPIO3 Designator3.GPIO4 Designator3.GPIO5 Designator3.GPIO6 Designator3.GPIO7 T1.6 U1.1 U1.2 U1.13 U1.14 U1.Paste1 U1.Paste2 U1.Paste3 U1.Paste4 U1.Paste5 U1.Paste6 U1.Paste7 U1.Paste8 U1.Paste9
copper on no net: | length 36.4
  Component Side w0.254: 3.825,58.175 ccw(c2.375,58.175) 3.825,58.175 ; 50.175,2.425 ccw(c48.725,2.425) 50.175,2.425
  Solder Side w0.254: 3.825,58.175 ccw(c2.375,58.175) 3.825,58.175 ; 50.175,2.425 ccw(c48.725,2.425) 50.175,2.425

## Polygon pours and split planes (outlines as drawn)
GND on Ground Plane (split plane): 2.523,59.489 2.669,59.465 2.812,59.424 2.949,59.367 3.079,59.295 3.2,59.209 3.31,59.11 3.409,59 3.495,58.879 3.567,58.749 3.624,58.612 3.665,58.469 3.689,58.323 3.698,58.175 3.689,58.027 3.665,57.881 3.624,57.738 3.567,57.601 3.495,57.471 3.409,57.35 3.31,57.24 3.2,57.141 3.079,57.055 2.949,56.983 2.812,56.926 2.669,56.885 2.523,56.861 2.375,56.852 2.227,56.861 2.081,56.885 1.938,56.926 1.801,56.983 1.671,57.055 1.55,57.141 1.44,57.24 1.341,57.35 1.255,57.471 1.183,57.601 1.126,57.738 1.085,57.881 1.061,58.027 1.052,58.175 1.061,58.323 1.085,58.469 1.126,58.612 1.183,58.749 1.255,58.879 1.341,59 1.44,59.11 1.55,59.209 1.671,59.295 1.801,59.367 1.938,59.424 2.081,59.465 2.227,59.489 2.375,59.498
GND on Ground Plane (split plane): 48.873,3.739 49.019,3.715 49.162,3.674 49.299,3.617 49.429,3.545 49.55,3.459 49.66,3.36 49.759,3.25 49.845,3.129 49.917,2.999 49.974,2.862 50.015,2.719 50.039,2.573 50.048,2.425 50.039,2.277 50.015,2.131 49.974,1.988 49.917,1.851 49.845,1.721 49.759,1.6 49.66,1.49 49.55,1.391 49.429,1.305 49.299,1.233 49.162,1.176 49.019,1.135 48.873,1.111 48.725,1.102 48.577,1.111 48.431,1.135 48.288,1.176 48.151,1.233 48.021,1.305 47.9,1.391 47.79,1.49 47.691,1.6 47.605,1.721 47.533,1.851 47.476,1.988 47.435,2.131 47.411,2.277 47.402,2.425 47.411,2.573 47.435,2.719 47.476,2.862 47.533,2.999 47.605,3.129 47.691,3.25 47.79,3.36 47.9,3.459 48.021,3.545 48.151,3.617 48.288,3.674 48.431,3.715 48.577,3.739 48.725,3.748
GND on Ground Plane (split plane): 50.75,0.51 0.51,0.51 0.51,59.99 50.75,59.99
+3V3 on Power Plane (split plane): 2.523,59.489 2.669,59.465 2.812,59.424 2.949,59.367 3.079,59.295 3.2,59.209 3.31,59.11 3.409,59 3.495,58.879 3.567,58.749 3.624,58.612 3.665,58.469 3.689,58.323 3.698,58.175 3.689,58.027 3.665,57.881 3.624,57.738 3.567,57.601 3.495,57.471 3.409,57.35 3.31,57.24 3.2,57.141 3.079,57.055 2.949,56.983 2.812,56.926 2.669,56.885 2.523,56.861 2.375,56.852 2.227,56.861 2.081,56.885 1.938,56.926 1.801,56.983 1.671,57.055 1.55,57.141 1.44,57.24 1.341,57.35 1.255,57.471 1.183,57.601 1.126,57.738 1.085,57.881 1.061,58.027 1.052,58.175 1.061,58.323 1.085,58.469 1.126,58.612 1.183,58.749 1.255,58.879 1.341,59 1.44,59.11 1.55,59.209 1.671,59.295 1.801,59.367 1.938,59.424 2.081,59.465 2.227,59.489 2.375,59.498
+3V3 on Power Plane (split plane): 48.873,3.739 49.019,3.715 49.162,3.674 49.299,3.617 49.429,3.545 49.55,3.459 49.66,3.36 49.759,3.25 49.845,3.129 49.917,2.999 49.974,2.862 50.015,2.719 50.039,2.573 50.048,2.425 50.039,2.277 50.015,2.131 49.974,1.988 49.917,1.851 49.845,1.721 49.759,1.6 49.66,1.49 49.55,1.391 49.429,1.305 49.299,1.233 49.162,1.176 49.019,1.135 48.873,1.111 48.725,1.102 48.577,1.111 48.431,1.135 48.288,1.176 48.151,1.233 48.021,1.305 47.9,1.391 47.79,1.49 47.691,1.6 47.605,1.721 47.533,1.851 47.476,1.988 47.435,2.131 47.411,2.277 47.402,2.425 47.411,2.573 47.435,2.719 47.476,2.862 47.533,2.999 47.605,3.129 47.691,3.25 47.79,3.36 47.9,3.459 48.021,3.545 48.151,3.617 48.288,3.674 48.431,3.715 48.577,3.739 48.725,3.748
+3V3 on Power Plane (split plane): 50.75,0.51 0.51,0.51 0.51,59.99 50.75,59.99

## Other copper
Component Side:
  rectangle net GND: 16.825,5.125 23.05,8.625
  rectangle net GND: 28.275,0.1 37.15,5.775
  rectangle net GND: 16.825,0.1 24.775,5.125
  text "TOP 1..." at 8.775,56.45 h1.2
Solder Side:
  rectangle net GND: 16.825,5.125 23.05,8.625
  rectangle net GND: 28.4,0.1 37.15,5.675
  rectangle net GND: 16.825,0.1 28.4,5.125
  text "4... BOT" at 17.35,56.45 h1.2
Ground Plane (plane layer: these items are gaps in the copper):
  circle w0.254: c2.375,58.175 r1.45
  circle w0.254: c48.725,2.425 r1.45
  text ".2.." at 13.525,56.425 h1.2
Power Plane (plane layer: these items are gaps in the copper):
  circle w0.254: c2.375,58.175 r1.45
  circle w0.254: c48.725,2.425 r1.45
  text "..3." at 13.625,56.525 h1.2

## Silkscreen, mask and mechanical layers (free items; w line width, h text height)
Top Overlay:
  rectangle: 24.525,42.275 25.5,43.3
  rectangle: 17.35,43.95 19.35,45.95
  rectangle: 16.15,44.925 18.15,46.925
  rectangle: 15.15,43.95 17.15,45.95
  rectangle: 14,43 16,45
  rectangle: 12.95,43.95 14.95,45.95
  lines w0.15: 9.5,24.4 14.8,24.4 19.4,24.4 30.2,24.4 30.2,40.5 9.5,40.5 9.5,30.175 9.5,25.825 9.5,24.4 ; 21.375,30.2 21.375,33.2 24.375,33.2 24.375,30.2 21.375,30.2
  text ".[..] / [..]." at 8.625,54.825 h1.2
  text "CS1 / CS2" at 13.55,54.825 h1.2
  text "GND" at 44.95,50.725 h1.2
  text "GPIO1" at 31.94,49.6 h1.2 r90
  text "GPIO6" at 19,49.3 h1.2 r90
  text "GPIO5" at 21.7,49.2 h1.2 r90
  text "GPIO4" at 24.26,49.2 h1.2 r90
  text "GPIO3" at 26.82,49.2 h1.2 r90
  text "GPIO2" at 29.38,49.2 h1.2 r90
  text "GPIO0" at 34.5,49.2 h1.2 r90
  text "SCK" at 44.95,48.19 h1.2
  text "MISO" at 43.95,45.655 h1.2
  text "TU" at 19.65,44.075 h1.8
  text "MOSI" at 44.15,43.12 h1.2
  text "Graz" at 19.85,42.4 h1.2
  text "CS1" at 45.35,40.585 h1.2
  text "IRQ" at 45.15,38.05 h1.2
  text "WakeUp" at 41.375,35.675 h1.2
  text "3V3 /  / GND / GND" at 3.225,33.65 h1.8
  text "GPIO0" at 42.6,31.6 h1.2
  text "U1" at 21.975,31.1 h1.2
  text "GPIO1" at 43,29.06 h1.2
  text "GPIO2" at 42.6,26.52 h1.2
  text "nRST" at 3.3,26.5 h1.2
  text "GPIO3" at 42.6,23.98 h1.2
  text "CS2" at 3.3,23.775 h1.2
  text "GPIO4" at 42.6,21.44 h1.2
  text "GPIO6" at 3.3,21.3 h1.2
  text "GPIO5" at 42.6,18.9 h1.2
Top Solder:
  rectangle: 24.775,0 28.275,5.3
  rectangle: 24.4,7 27.45,9.85
Mechanical 1:
  the board outline again, w0.1